# Altium PCB PCB_CSN_V3_3.PcbDoc
Units mil, origin at the board's own origin, x right, y up, seen from the top; angles counter-clockwise.
Board outline 3040 x 2075 mil, 2 copper layers (Top Layer, Bottom Layer); 91 components, 64 nets, 347 pads, 41 vias.
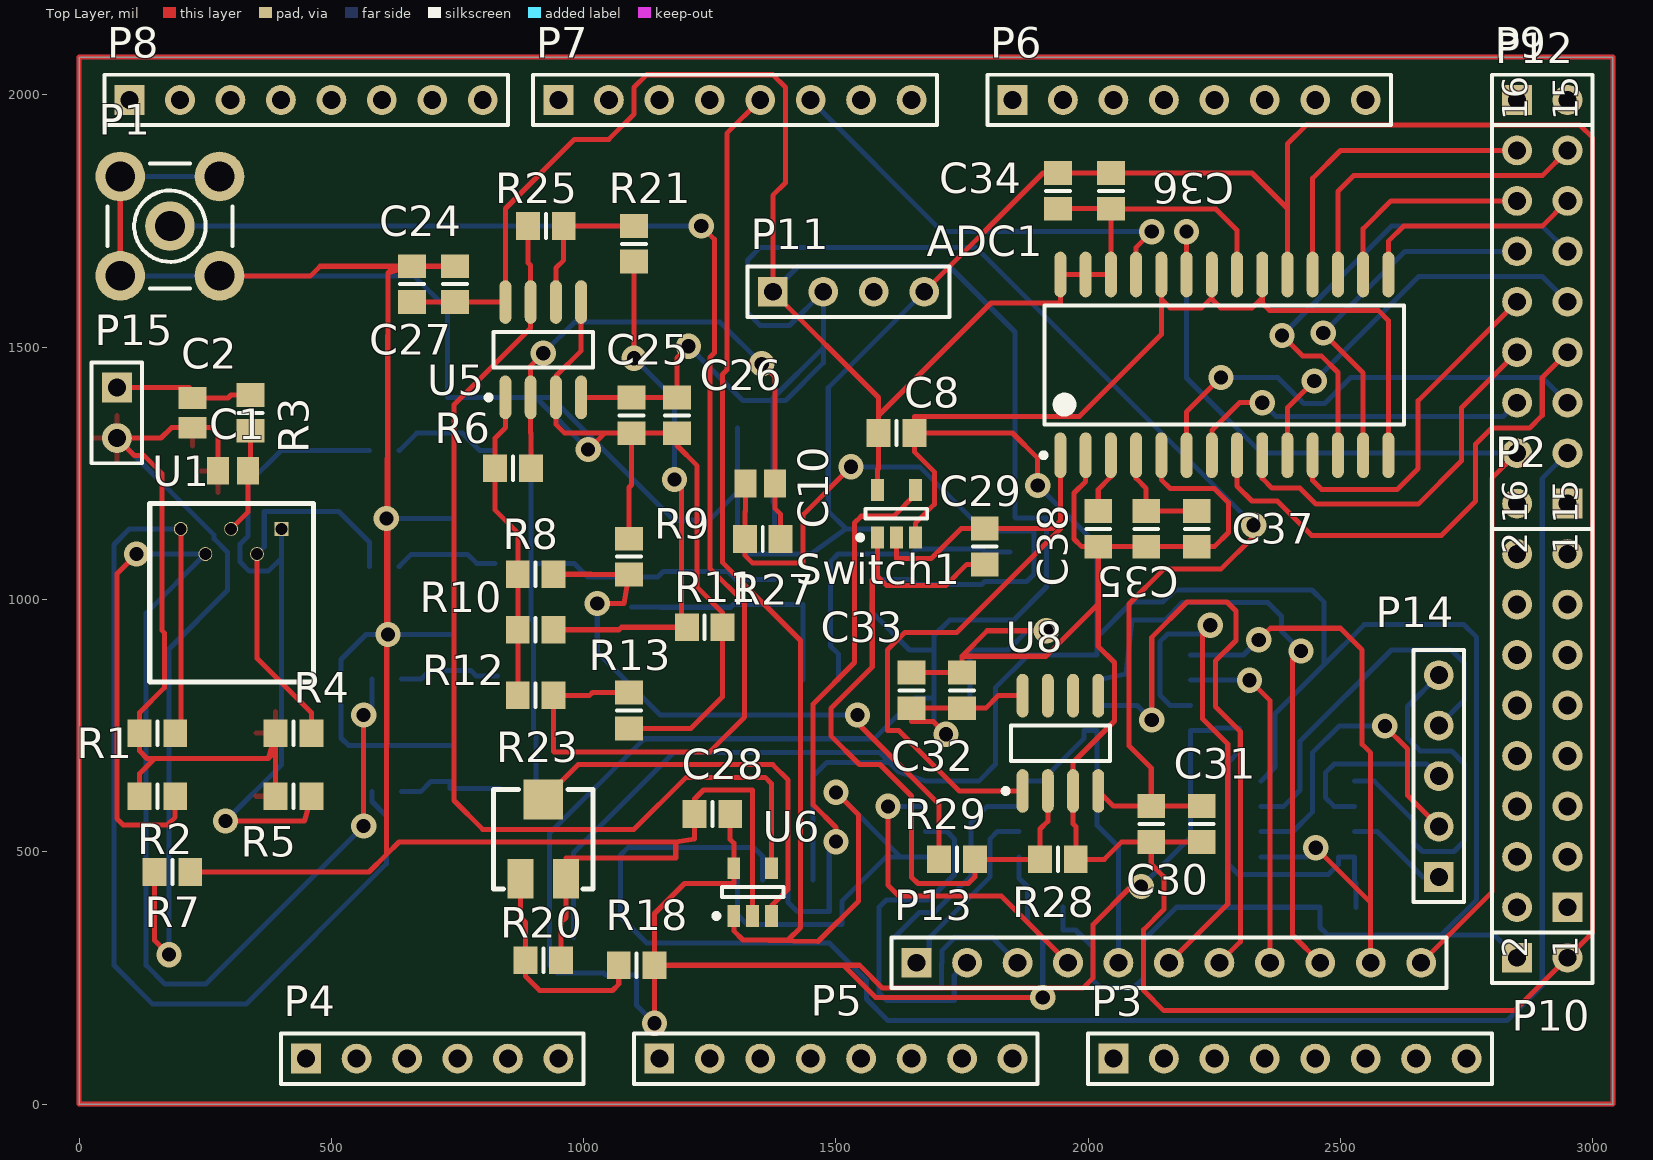
[diagram p0: Top Layer view]
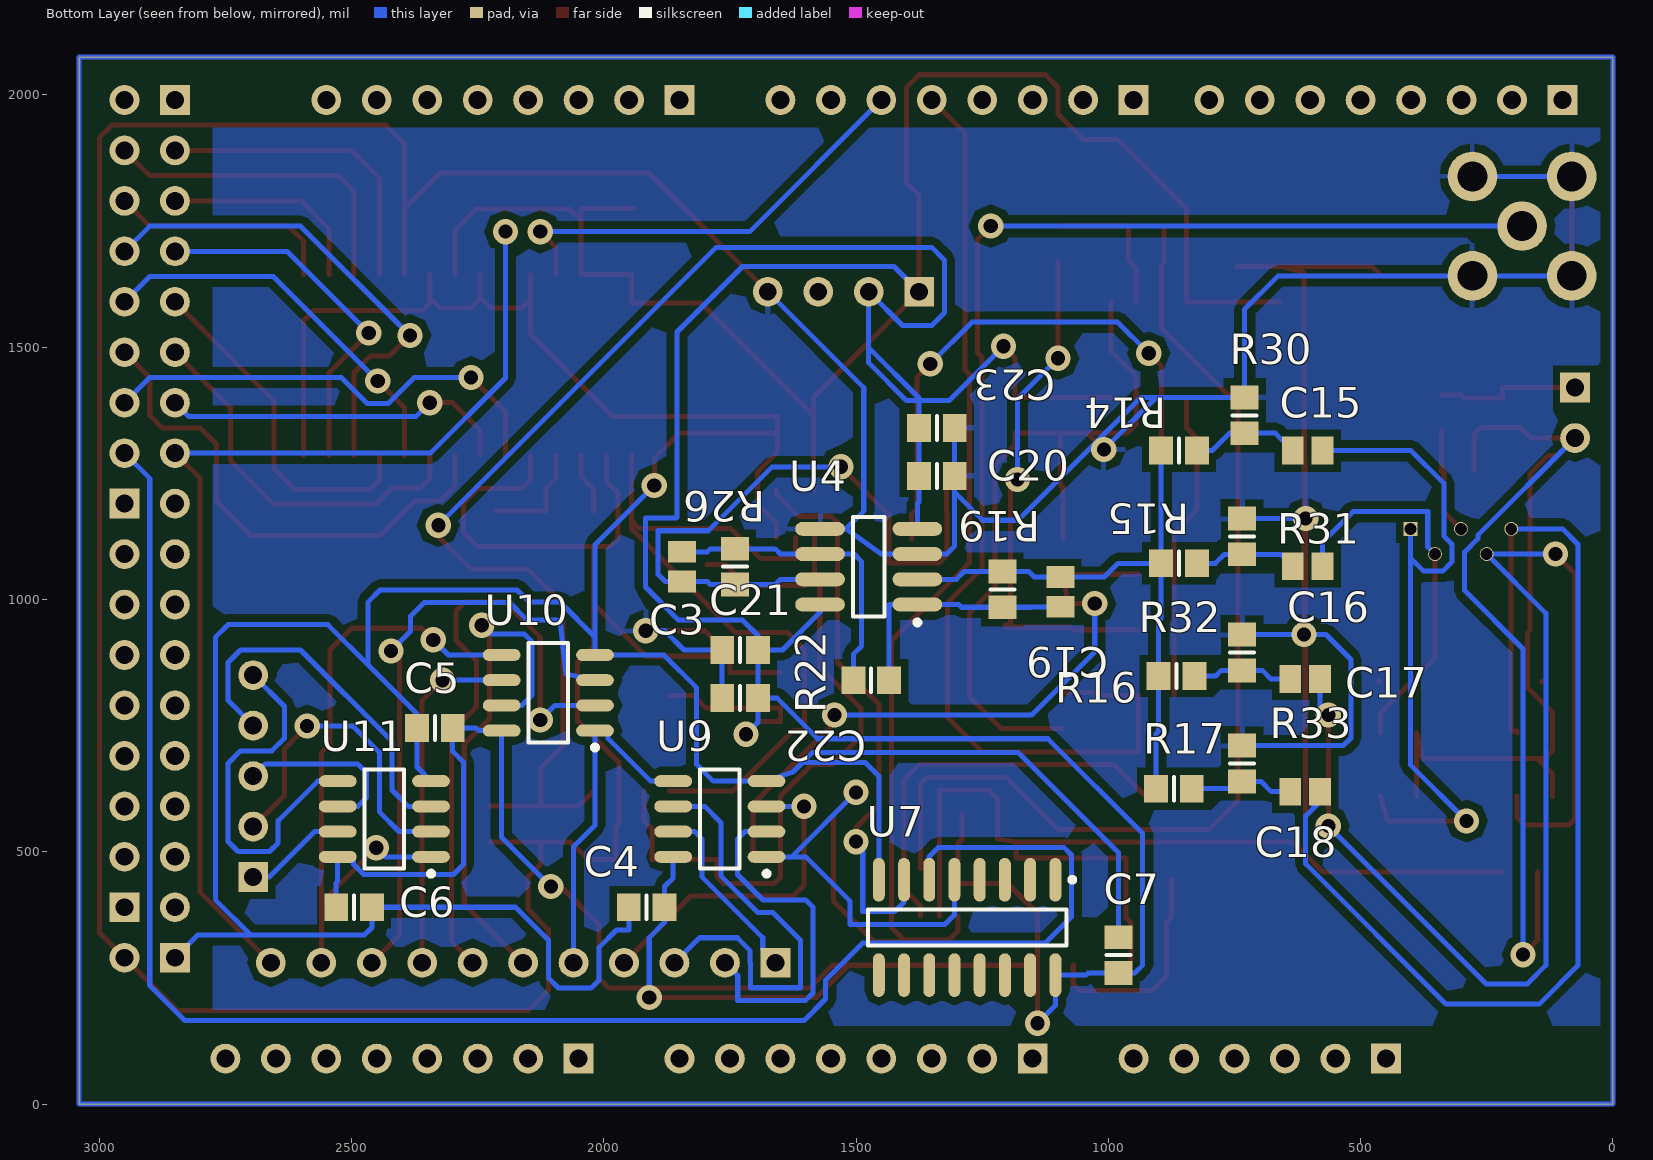
[diagram p1: Bottom Layer view, seen from below]

## Layer stack, top to bottom
Top Layer: signal copper 1.4
Dielectric: dielectric 12.6, FR-4, Dk 4.8
Bottom Layer: signal copper 1.4

## Board outline
0,0 0,2075 3040,2075 3040,0 0,0

## Design rules (kind name [scope] priority, off if disabled: settings)
Clearance [All] p1: gap=15
PolygonConnect [All] p1: connectstyle=Relief reliefconductorwidth=10 reliefentries=4 polygonreliefangle="90 Angle"
RoomDefinition RoomDefinition_1 [InComponentClass('Components Class 1') vs False] p1: confinementstyle=ConfineIn formatcopy=TRUE lockcomponents=FALSE outline 20,1490 520,1490 520,510 20,510
RoutingVias [All] p1: holewidth=28 width=50 viastyle="Through Hole" minholewidth=28 minwidth=50 maxholewidth=28 maxwidth=50
SilkscreenOverComponentPads [All] p1: minsilkscreentomaskgap=10
SolderMaskExpansion [All] p1: expansion=4
Width [All] p1: maxlimit=10 minlimit=10 preferedwidth=10
27 further rules are at their usual default settings.

## Classes and differential pairs
component class "Components Class 2": ADC1 C1 C2 C3 C4 C5 C6 C7 C8 C10 C15 C16 C17 C18 C19 C20 C21 C22 C23 C24 C25 C26 C27 C28 C29 C30 C31 C32 C33 C34 C35 C36 C37 C38 P1 P11 P13 P14 R1 R2 R3 R4 R5 R6 R7 R8 R9 R10 R11 R12 R13 R14 R15 R16 R17 R18 R19 R20 R21 R22 R23 R25 R26 R27 R28 R29 R30 R31 R32 R33 Switch1 U1 U4 U5 U6 U7 U8 U9 U10 U11
component class "Components Class 1": C1 C2 P15 R1 R2 R3 R4 R5 U1
net class potencia: +5 -5 GND
component class Logica_ADC: ADC1 C4 C5 C6 C7 C8 C29 C30 C31 C32 C33 C34 C35 C36 C37 C38 P2 P3 P4 P5 P6 P7 P8 P9 P10 P11 P12 P13 P14 R28 R29 Switch1 U7 U8 U9 U10 U11
component class Hamamatsu_acond_2: C1 C2 C3 C10 C15 C16 C17 C18 C19 C20 C21 C22 C23 C24 C25 C26 C27 C28 P1 P15 R1 R2 R3 R4 R5 R7 R8 R9 R10 R11 R12 R13 R14 R15 R16 R17 R18 R19 R20 R21 R22 R23 R25 R26 R27 R30 R31 R32 R33 U1 U4 U5 U6
net class analog: NetADC1_1 NetADC1_4 NetC29_1 NetR18_2 NetR23_W NetR25_2
net class digital: DGND NetADC1_18 NetADC1_23 NetADC1_25 NetSwitch1_4

## Components (designator, comment, footprint, x,y, rotation, side; value= is the part's Value field where it differs from the comment)
ADC1 "LTC1415" SO28_N 2270,1465 r90 top
C1 "Cap" C0805 305,1255 r0 top
C2 "Cap" C0805 225,1370 r90 top
C3 "Cap" C0805 1845,1065 r270 bottom
C4 "Cap" 6-0805_N 1915,390 r180 bottom
C5 "Cap" 6-0805_N 2335,745 r0 bottom
C6 "Cap" 6-0805_N 2495,390 r180 bottom
C7 "Cap" 6-0805_N 980,295 r90 bottom
C8 "Cap" 6-0805_N 1620,1330 r180 top
C10 "Cap" C0805 1350,1230 r0 top
C15 "Cap" C0805 605,1295 r0 bottom
C16 "Cap" C0805 605,1065.76 r0 bottom
C17 "Cap" C0805 610,842.43 r0 bottom
C18 "Cap" C0805 610,619.09 r0 bottom
C19 "Cap" C0805 1095,1015 r270 bottom
C20 "Cap Pol3" 6-0805_N 1340,1245 r0 bottom
C21 "Cap Pol3" 6-0805_N 1730,900 r0 bottom
C22 "Cap" 6-0805_N 1730,805 r180 bottom
C23 "Cap" 6-0805_N 1340,1340 r0 bottom
C24 "Cap" 6-0805_N 745,1625 r270 top
C25 "Cap" 6-0805_N 1095,1365 r270 top
C26 "Cap Pol3" 6-0805_N 1185,1365 r90 top
C27 "Cap Pol3" 6-0805_N 660,1625 r90 top
C28 "Cap" 6-0805_N 1255,575 r180 top
C29 "Cap" 6-0805_N 1795,1105 r90 top
C30 "Cap" 6-0805_N 2125,555 r270 top
C31 "Cap Pol3" 6-0805_N 2225,555 r90 top
C32 "Cap" 6-0805_N 1750,820 r270 top
C33 "Cap Pol3" 6-0805_N 1650,820 r90 top
C34 "Cap Pol3" 6-0805_N 1940,1810 r90 top
C35 "Cap Pol3" 6-0805_N 2115,1140 r270 top
C36 "Cap" 6-0805_N 2045,1810 r270 top
C37 "Cap" 6-0805_N 2215,1140 r90 top
C38 "Cap" 6-0805_N 2020,1140 r270 top
P1 "SMB" SMB_V-RJ45 180,1740 r0 top
P2 "Header 8X2" HDR2X8 2950,390 r90 top
P3 "Header 8" HDR1X8 2050,90 r0 top
P4 "Header 6" HDR1X6 450,90 r0 top
P5 "Header 8" HDR1X8 1150,90 r0 top
P6 "Header 8" HDR1X8 1850,1990 r0 top
P7 "Header 8" HDR1X8 950,1990 r0 top
P8 "Header 8" HDR1X8 100,1990 r0 top
P9 "Header 2" HDR1X2 2850,1990 r0 top
P10 "Header 2" HDR1X2 2850,290 r0 top
P11 "Header 4" HDR1X4 1375,1610 r0 top
P12 "Header 8X2" HDR2X8 2950,1190 r90 top
P13 "Header 11" HDR1X11 1660,280 r0 top
P14 "Header 5" HDR1X5 2695,450 r90 top
P15 "Header 2" HDR1X2 75,1420 r270 top
R1 "Res3" 6-0805_N 155,735 r0 top
R2 "Res3" 6-0805_N 155,610 r0 top
R3 "Res3" 6-0805_N 340,1370 r90 top
R4 "Res3" 6-0805_N 425,735 r0 top
R5 "Res3" 6-0805_N 425,610 r0 top
R6 "Res3" 6-0805_N 860,1260 r180 top
R7 "Res3" 6-0805_N 185,460 r180 top
R8 "Res3" 6-0805_N 905,1050 r180 top
R9 "Res3" 6-0805_N 1090,1085 r270 top
R10 "Res3" 6-0805_N 905,940 r180 top
R11 "Res3" 6-0805_N 1240,945 r180 top
R12 "Res3" 6-0805_N 905,810 r180 top
R13 "Res3" 6-0805_N 1090,780 r90 top
R14 "Res3" 6-0805_N 860,1295 r0 bottom
R15 "Res3" 6-0805_N 860,1071.67 r0 bottom
R16 "Res3" 6-0805_N 865,848.33 r0 bottom
R17 "Res3" 6-0805_N 870,625 r0 bottom
R18 "Res3" 6-0805_N 1105,275 r180 top
R19 "Res3" 6-0805_N 1210,1020 r270 bottom
R20 "Res3" 6-0805_N 920,285 r180 top
R21 "Res3" 6-0805_N 1100,1705 r90 top
R22 "Res3" 6-0805_N 1470,840 r180 bottom
R23 "RPot SM" POT4MM-2 920,525 r90 top
R25 "Res3" 6-0805_N 925,1740 r180 top
R26 "Res3" 6-0805_N 1740,1065 r270 bottom
R27 "Res3" 6-0805_N 1355,1120 r0 top
R28 "Res3" 6-0805_N 1940,485 r0 top
R29 "Res3" 6-0805_N 1740,485 r0 top
R30 "Res3" 6-0805_N 730,1365 r270 bottom
R31 "Res3" 6-0805_N 735,1125 r270 bottom
R32 "Res3" 6-0805_N 735,895 r270 bottom
R33 "Res3" 6-0805_N 735,675 r270 bottom
Switch1 "SN74LVC1G66DBVR" SOT23-5_N 1620,1170 r90 top
U1 "MPPC_S10985" S10985_HAM 140,1190 r0 top
U4 "AD8056" SO-8_M 1475,1065 r0 bottom
U5 "AD8056" S8_N 920,1495 r90 top
U6 "ADCMP600" SOT23-5_N 1335,420 r90 top
U7 "SN74LS279AD" D016_N 1280,350 r270 bottom
U8 "THS4062" S8_N 1945,715 r90 top
U9 "DS1100-500" SO-8_L 1770,565 r0 bottom
U10 "DS1100-500" SO-8_L 2110,815 r0 bottom
U11 "DS1100-500" SO-8_L 2435,565 r0 bottom

## Footprints (in the part's own frame and the unit in brackets; to place one, negate y for a bottom-side part, rotate by r counter-clockwise, add the part's x,y. Pads: shape width x height; smd on the part's side, far side on the other; paste and mask are expansions set on the pad)
6-0805_N [mm] "Chip Resistor, Body 2.0x1.2mm, IPC Medium Density"
  rect 1.2x1.4 smd: 1(-0.9,0) 2(0.9,0)
  silkscreen extent 0,-0.6 0,0.6, body extent -1.07,-0.7 1.07,0.7, height 0.7
C0805 [mm] "Chip Capacitor, Body 2.0x1.3mm, IPC High Density"
  rect 1.1x1.4 smd: 1(-0.75,0) 2(0.75,0)
  body extent -1.1,-0.72 1.1,0.72, height 1.4
D016_N [mm] "SOIC, 16-Leads, Body 9.9x3.9mm, Pitch 1.27mm, IPC Medium Density"
  oval 2.2x0.6 smd: 1(-2.4,4.445) 2(-2.4,3.175) 3(-2.4,1.905) 4(-2.4,0.635) 5(-2.4,-0.635) 6(-2.4,-1.905) 7(-2.4,-3.175) 8(-2.4,-4.445) 9(2.4,-4.445) 10(2.4,-3.175) 11(2.4,-1.905) 12(2.4,-0.635) 13(2.4,0.635) 14(2.4,1.905) 15(2.4,3.175) 16(2.4,4.445)
  silkscreen extent -2.52,-5 0.9,5.42, body extent -1.95,-4.95 1.95,4.95, height 1.75
HDR1X2 [mm] "Connector; Header; 2 Position"
  rect 1.5x1.5 hole 0.9: 1(0,0)
  round 1.5 hole 0.9: 2(2.54,0)
  silkscreen extent -1.27,-1.27 3.81,1.27
HDR1X4 [mm] "Connector; Header; 4 Position"
  rect 1.5x1.5 hole 0.9: 1(0,0)
  round 1.5 hole 0.9: 2(2.54,0) 3(5.08,0) 4(7.62,0)
  silkscreen extent -1.27,-1.27 8.89,1.27
HDR1X5 [mm] "Connector; Header; 5 Position"
  rect 1.5x1.5 hole 0.9: 1(0,0)
  round 1.5 hole 0.9: 2(2.54,0) 3(5.08,0) 4(7.62,0) 5(10.16,0)
  silkscreen extent -1.27,-1.27 11.43,1.27
HDR1X6 [mm] "Connector; Header; 6 Position"
  rect 1.5x1.5 hole 0.9: 1(0,0)
  round 1.5 hole 0.9: 2(2.54,0) 3(5.08,0) 4(7.62,0) 5(10.16,0) 6(12.7,0)
  silkscreen extent -1.27,-1.27 13.97,1.27
HDR1X8 [mm] "Connector; Header; 8 Position"
  rect 1.5x1.5 hole 0.9: 1(0,0)
  round 1.5 hole 0.9: 2(2.54,0) 3(5.08,0) 4(7.62,0) 5(10.16,0) 6(12.7,0) 7(15.24,0) 8(17.78,0)
  silkscreen extent -1.27,-1.27 19.05,1.27
HDR1X11 [mm] "Connector; Header; 11 Position"
  rect 1.5x1.5 hole 0.9: 1(0,0)
  round 1.5 hole 0.9: 2(2.54,0) 3(5.08,0) 4(7.62,0) 5(10.16,0) 6(12.7,0) 7(15.24,0) 8(17.78,0) 9(20.32,0) 10(22.86,0) 11(25.4,0)
  silkscreen extent -1.27,-1.27 26.67,1.27
HDR2X8 [mm] "Connector; Header; 8x2 Position"
  rect 1.5x1.5 hole 0.9: 1(0,0)
  round 1.5 hole 0.9: 2(0,2.54) 3(2.54,0) 4(2.54,2.54) 5(5.08,0) 6(5.08,2.54) 7(7.62,0) 8(7.62,2.54) 9(10.16,0) 10(10.16,2.54) 11(12.7,0) 12(12.7,2.54) 13(15.24,0) 14(15.24,2.54) 15(17.78,0) 16(17.78,2.54)
  silkscreen extent -1.27,-1.27 19.05,3.81
POT4MM-2 [mm] "Square Trimming Potentiometer"
  rect 2x1.3 smd: CCW(-2,-1.15) CW(-2,1.15)
  rect 2x2 smd: W(2,0)
  silkscreen extent -2.5,-2.5 2.5,2.5
S8_N [mm] "SOIC, 8-Leads, Body 4.9x3.9mm, Pitch 1.27mm, IPC Medium Density"
  oval 2.2x0.6 smd: 1(-2.4,1.905) 2(-2.4,0.635) 3(-2.4,-0.635) 4(-2.4,-1.905) 5(2.4,-1.905) 6(2.4,-0.635) 7(2.4,0.635) 8(2.4,1.905)
  silkscreen extent -2.52,-2.5 0.9,2.88, body extent -2,-2.5 2,2.5, height 1.76
S10985_HAM [mm]
  rect 0.7x0.7 hole 0.6: 1(6.64,-1.27)
  round 0.7 hole 0.6: 2(5.4,-2.54) 3(4.1,-1.27) 4(2.8,-2.54) 5(1.56,-1.27)
  Top Layer lines w0.254: 0,-8.95 0.025,-8.975 ; 8.175,-8.975 8.25,-8.9
  silkscreen extent 0,-8.97 8.25,0
SMB_V-RJ45 [mm] "Connector; SMB Straight"
  round 2.5 hole 1.5: 1(0,0) 2(-2.5,-2.5) 2(-2.5,2.5) 2(2.5,-2.5) 2(2.5,2.5)
  silkscreen extent -3.15,-3.15 3.15,3.15
SO28_N [mm] "28-Pin Plastic Small Outline Integrated Circuit 1.27 mm Pitch, IPC Medium Density"
  oval 2.3x0.6 smd: 1(-4.55,8.255) 2(-4.55,6.985) 3(-4.55,5.715) 4(-4.55,4.445) 5(-4.55,3.175) 6(-4.55,1.905) 7(-4.55,0.635) 8(-4.55,-0.635) 9(-4.55,-1.905) 10(-4.55,-3.175) 11(-4.55,-4.445) 12(-4.55,-5.715) 13(-4.55,-6.985) 14(-4.55,-8.255) 15(4.55,-8.255) 16(4.55,-6.985) 17(4.55,-5.715) 18(4.55,-4.445) 19(4.55,-3.175) 20(4.55,-1.905) 21(4.55,-0.635) 22(4.55,0.635) 23(4.55,1.905) 24(4.55,3.175) 25(4.55,4.445) 26(4.55,5.715) 27(4.55,6.985) 28(4.55,8.255)
  silkscreen extent -4.67,-9.05 3,9.23, body extent -3.8,-9.06 3.8,9.06, height 2.65
SO-8_L [mm] "SOIC, 8-Leads, Body 4.9x3.9mm, Pitch 1.27mm, IPC High Density"
  oval 1.9x0.6 smd: 1(-2.35,1.905) 2(-2.35,0.635) 3(-2.35,-0.635) 4(-2.35,-1.905) 5(2.35,-1.905) 6(2.35,-0.635) 7(2.35,0.635) 8(2.35,1.905)
  silkscreen extent -2.47,-2.5 1,2.88, body extent -1.95,-2.45 1.95,2.45, height 1.75
SO-8_M [mm] "SOIC, 8-Leads, Body 4.9x3.9mm, Pitch 1.27mm, IPC Low Density"
  oval 2.5x0.7 smd: 1(-2.45,1.905) 2(-2.45,0.635) 3(-2.45,-0.635) 4(-2.45,-1.905) 5(2.45,-1.905) 6(2.45,-0.635) 7(2.45,0.635) 8(2.45,1.905)
  silkscreen extent -2.57,-2.5 0.8,2.93, body extent -2,-2.5 2,2.5, height 1.75
SOT23-5_N [mm] "SOT23, 5-Leads, Body 2.9x1.6mm, Pitch 0.95mm, Lead Span 2.8mm, IPC Medium Density"
  rect 1.1x0.65 smd: 1(-1.2,0.95) 2(-1.2,0) 3(-1.2,-0.95) 4(1.2,-0.95) 5(1.2,0.95)
  silkscreen extent -1.32,-1.55 0.25,1.95, body extent -0.9,-1.55 0.9,1.55, height 1.45

## Part data
C1 C2 C3 C4 C5 C6 C7 C8 C10 C15 C16 C17 C18 C19 C22 C23 C24 C25 C28 C29 C30 C32 C36 C37 C38: "Capacitor"
C20 C21 C26 C27 C31 C33 C34 C35: "Polarized Capacitor (Surface Mount)"
P1: "SMB Straight Connector"
P2 P12: "Header, 8-Pin, Dual row"
P3 P5 P6 P7 P8: "Header, 8-Pin"
P4: "Header, 6-Pin"
P9 P10 P15: "Header, 2-Pin"
P11: "Header, 4-Pin"
P13: "Header, 11-Pin"
P14: "Header, 5-Pin"
R1 R2 R3 R4 R5 R6 R7 R8 R9 R10 R11 R12 R13 R14 R15 R16 R17 R18 R19 R20 R21 R22 R25 R26 R27 R28 R29 R30 R31 R32 R33: "Resistor"
R23: "Square Trimming Potentiometer"
U4: library part AD8002AR, "Dual 600MHz, 50mW Current Feedback Amplifier"
U5 U8: library part LT1253CS8, "Low Cost Dual Video Amplifier"
U7: "Quadruple S-R Latches"

## Via types
v1: diameter 50, hole 28, Top Layer to Bottom Layer, 41 vias

## Nets (pads, with @x,y where several pads share a name; then routed paths per layer and width w, separated by ;. In a path a pad name is that pad's centre, name@x,y a point inside that pad or via, vN(x,y) a via of type N, cw(c..) or ccw(c..) an arc to the next point about the centre after c; other vN are vias at no path point)
70_GND: C1.1 C2.1 P15.2 R1.1 R2.1 R4.1 R5.1 R7.2 | length 2899.1
  Top Layer w10: R2.1 119.57,654.57 150,685 ; R7.2 149.57,324.43 v1(178,296) ; C1.1 275.47,1327.5 262.5,1340.47 C2.1 183,1340.47 162.53,1320 P15.2 109.9,1285.1 128.9,1285.1 164,1250 164,939 169,934 169,825 119.57,775.57 R1.1 119.57,700 134.57,685 150,685 ; R5.1 389,610 389,699 ; 150,685 375,685 ; 375,685 389,699 ; 375,685 R4.1@389,735 ; 389,699 389.57,699.57 R4.1 R4.1@389,735 ; 389,699 R4.1@389,735
  Bottom Layer w10: P15.2 267.64,1127.36 267.64,1120.37 293.82,1094.19 293.82,1017.83 178,902.01 v1(178,296)
+5: ADC1.21 ADC1.26 ADC1.27 ADC1.28 C4.2 C5.1 C6.1 C7.1 C8.2 C21.1 C22.2 C24.2 C27.1 C28.1 C32.2 C33.1 C34.1 C36.2 P11.1 R18.1 Switch1.5 U4.8 U5.8 U6.5 U7.16 U8.8 U9.8 U10.8 U11.8 | length 10202.1
  Top Layer w10: C27.1 702,1589.57 C24.2 794,1589.57 794.08,1589.49 U5.8 845,1775 982,1912 1050,1912 1100,1962 1100,2015 1125,2040 1375,2040 1400,2015 1400,1826 1375,1801 P11.1 1584.57,1400.43 1584.57,1364.57 ; v1(1140.43,160) R18.1 ; C28.1 1290.43,524.16 1297.6,517 U6.5 1297.6,437 1200,437 1140.43,377.43 R18.1 ; Switch1.5 1582.6,1257.44 1584.57,1259.41 C8.2 1584.57,1364.57 ; v1(1718,733) 1693,758 1650,758 C33.1 1699,784.57 C32.2 1797,784.57 1821.92,809.49 U8.8 ; v1(1910,211) 1579,211 1515,275 ; C34.1 1992,1774.57 C36.2 2045,1750.79 ; v1(2105,431) 2085,431 2010,356 2010,250 1990,230 1592,230 1547,275 1515,275 ; ADC1.21 2295,1731.81 2252.81,1774 2068.21,1774 2045,1750.79 ; R18.1 1515,275 ; 1584.57,1364.57 1807.5,1587.5 1945,1587.5 ADC1.28 ADC1.27 ADC1.26 2045,1709 2045,1750.79
  Bottom Layer w10: v1(1140.43,160) 1105,195.43 U7.16 1044.05,255.51 1040,259.57 C7.1 947.43,259.57 932,275 932,536 1120,724 1576,724 1657,805 C22.2 ; P11.1 1425,1660 1725,1660 1855,1530 1855,1163 1856.82,1161.18 1917.56,1161.18 1917.56,1024.56 1852,959 1725,959 1694.57,928.57 C21.1 ; U4.8 1571,990 1571,975 1646,900 C21.1 ; v1(1718,733) 1694.57,756.43 C22.2 ; U9.8 1862.52,448.05 1879.57,431 C4.2 1879.57,360 1910,329.57 v1(1910,211) ; v1(2105,431) 2203,529 U10.8@2203,740 ; U10.8 U10.8@2203,740 ; C6.1 2530.43,438 2527.52,440.91 U11.8 2496,490 2496,475 2476,455 2298,455 2278,475 2278,677.43 2299.57,699 C5.1 2253,745 2248,740 U10.8@2203,740 ; C22.2 C21.1
+70V: C2.2 P15.1 R3.2 | length 287.9
  Top Layer w10: P15.1 219,1420 219,1399.53 C2.2 295.09,1399.53 301,1405.43 R3.2
-5: C20.2 C23.2 C25.1 C26.2 C30.1 C31.2 P11.2 U4.4 U5.4 U8.4 | length 3681.9
  Top Layer w10: U5.4 1044,1400.51 1044.08,1400.43 C25.1 C26.2 1185,1479 v1(1208,1502) ; U8.4 2050.08,590.43 C30.1 ; C31.2 C30.1 ; v1(2328,1147) 2328,1125 2263,1060 2150,1060 2081,991 2081,710 2125,666 C30.1
  Bottom Layer w10: v1(1208,1502) 1316,1394 1375.43,1394 ; U4.4 1378.54,1190 1375.43,1193.11 C20.2 C23.2 1375.43,1394 ; v1(2328,1147) 1777,1698 1350,1698 1325,1673 1325,1568 1350,1543 1408,1543 P11.2 1475,1499 ; 1375.43,1394 1375.43,1399.43 1475,1499 ; 1375.43,1394 1400,1394 1475,1469 1475,1499
DGND: ADC1.14 ADC1.20 ADC1.22 ADC1.24 C4.1 C5.2 C6.2 C7.2 C8.1 P10.1 Switch1.3 U7.8 U9.4 U10.4 U11.4 | length 7462.6
  Top Layer w10: Switch1.3 1657.4,1151 1695,1188.6 1695,1253 1655.43,1292.57 C8.1 ; v1(1900,1226) 1900,1280 1850,1330 C8.1 ; ADC1.24 2145,1595.5 ; ADC1.22 2245,1598 ; ADC1.20 2345,1598 ; ADC1.14 2595,1553 2575,1573 2359.5,1573 2345,1587.5 2345,1598 ; C8.1 1655.43,1362.5 1982.5,1362.5 2145,1525 2145,1595.5 ; 2145,1595.5 2162.5,1578 2225,1578 2245,1598 ; 2245,1598 2245,1595.5 2262.5,1578 2325,1578 2345,1598
  Bottom Layer w10: C7.2 980,498 1179,697 1586.12,697 1606.12,677 ; U7.8 1455,650 1482,677 1606.12,677 ; v1(1900,1226) 2017.48,1108.52 2017.48,925 ; C4.1 1950.43,345 1975,345 2010,310 2010,245 2025,230 2090,230 2110,250 2110,325 2175,390 C6.2 2459.57,350 2474.57,335 2700,335 ; U11.4 2370.43,667.95 C5.2 2370.43,773.43 2467,870 ; P10.1 2805,335 2700,335 ; 1606.12,677 1625,658.12 U9.4 1783,640 1816,673 1816,825 1881,890 U10.4 2017.48,925 ; 2017.48,925 2087,995 2148,995 2172,1019 2443.44,1019 2467,995.44 2467,870 ; 2467,870 2547,950 2745,950 2770,925 2770,405 2700,335
GND: ADC1.2 ADC1.5 ADC1.19 C20.1 C21.2 C22.1 C23.1 C24.1 C25.2 C26.1 C27.2 C28.2 C30.2 C31.1 C32.1 C33.2 C34.2 C35.2 C36.1 C37.1 C38.2 P1.2 P10.2 P11.4 R7.1 R9.1 R11.1 R13.1 R20.1 R23.CCW R28.2 R30.1 R31.1 R32.1 R33.1 U4.3 U4.5 U5.3 U5.5 U6.2 U8.3 | length 17656.5
  Top Layer w10: P1.2@81.57,1641.57 P1.2@81.57,1838.43 ; R7.1 574.67,460 609,494.33 ; P1.2@278.43,1641.57 459,1641.57 477.86,1660.43 625,1660.43 ; v1(609,1160.43) 609,494.33 ; v1(612,930.43) 612,1647.43 ; C24.1 702,1660.43 C27.2 ; R20.1 955.43,360 965.28,369.84 R23.CCW 965.28,488 1182.57,488 1182.57,519.37 ; U5.5 995,1493 945,1443 U5.3 945,1347.07 962.5,1329.57 1041.57,1329.57 ; v1(1009,1297) 1041.57,1329.57 ; R13.1 1213,744.57 1275.43,807 R11.1 1275.43,973.8 1225,1024.23 1225,1265 1185,1305 C26.1 1139,1329.57 C25.2 ; R9.1 1090,1222 1095,1227 C25.2 ; U6.2 1335,622.56 1237.5,622.56 1219.57,604.63 C28.2 1219.57,525 1182.57,519.37 ; C33.2 C32.1 1750,887.5 ; P11.4 1910.43,1845.43 C34.2 C36.1 2324.57,1845.43 2395,1775 ; v1(1917,938) 1800,938 1750,887.5 ; ADC1.2 1995,1234 1972,1211 1972,1120.07 1987.5,1104.57 C38.2 ; ADC1.5 2145,1237.5 2162.5,1220 2250,1220 2278,1192 2278,1132.57 2250,1104.57 C37.1 C35.2 C38.2 ; C31.1 2174,519.57 C30.2 ; ADC1.19 2395,1775 ; 609,494.33 610.13,930.44 610.73,1160.43 612,1647.43 ; 609,494.33 634.04,519.37 1182.57,519.37 ; 612,1647.43 625,1660.43 ; 612,1647.43 C27.2 ; 625,1660.43 C27.2 ; 1041.57,1329.57 C25.2 ; 1750,887.5 1916.5,887.5 2020,991 ; 2020,991 2020,907 2052,875 2052,759 1970,677 U8.3 1970,555.43 1975.43,550 R28.2 2032,485 2066.57,519.57 C30.2 ; 2020,991 C38.2 ; C30.2 2125,475.58 2150,450.58 2150,385.58 2110,345.58 2110,225 2150,185 2845,185 P10.2 3000,340 3000,1915 2975,1940 2432,1940 2395,1903 2395,1775
  Bottom Layer w10: P1.2@81.57,1641.57 278.43,1641.57 663.43,1641.57 730,1575 R30.1 905.57,1400.43 ; P1.2@81.57,1838.43 P1.2@278.43,1838.43 ; v1(609,1160.43) R31.1 ; R33.1 534.19,710.43 519,725.62 519,881 568.43,930.43 v1(612,930.43) R32.1 ; v1(1009,1297) 905.57,1400.43 ; C23.1 C20.1 1304.57,1212.5 ; U4.5 1519.8,1140 ; P11.4 1484.8,1419.8 1484.8,1175 1519.8,1140 ; C22.1 1765.43,852 C21.2 1841,900 1879,938 v1(1917,938) ; 905.57,1400.43 935.57,1400.43 1179,1157 1249.07,1157 1304.57,1212.5 ; 1304.57,1212.5 1304.57,1106 1320.57,1090 U4.3 1450,1090 1519.8,1140
NetADC1_1: ADC1.1 C29.2 Switch1.2 U8.1 | length 1464.1
  Top Layer w10: Switch1.2 1620,1081 1688.57,1081 1748,1140.43 C29.2 1929.84,1140.43 1945,1155.59 ; U8.1 1870,620 1745,620 1625,740 1602,740 1602,900 1637,935 1740,935 1945,1140 1945,1155.59 ; ADC1.1 1945,1155.59
NetADC1_3: ADC1.3 C38.1 | length 120.8
  Top Layer w10: C38.1 2020,1218 2045,1243 ADC1.3
NetADC1_4: ADC1.4 C35.1 C37.2 | length 218.7
  Top Layer w10: ADC1.4 2095,1240 2115,1220 C35.1 2164,1175.43 C37.2
NetADC1_6: ADC1.6 P12.5 | length 933.1
  Top Layer w10: ADC1.6 2195,1372 v1(2263,1440)
  Bottom Layer w10: v1(2263,1440) 2375.83,1440 2427.83,1388 2468.25,1388 2520.25,1440 2900,1440 P12.5
NetADC1_7: ADC1.7 P12.6 | length 699.3
  Top Layer w10: ADC1.7 2245,1335 2300,1390 v1(2345,1390)
  Bottom Layer w10: v1(2345,1390) 2372,1363 2823,1363 P12.6
NetADC1_8: ADC1.8 P12.7 | length 1017.2
  Top Layer w10: ADC1.8 2295,1224.5 2324.5,1195 2375,1195 2443,1127 2700,1127 2768,1195 2768,1308 2800,1340 2875,1340 2900,1365 2900,1440 P12.7
NetADC1_9: ADC1.9 P12.8 | length 758.2
  Top Layer w10: ADC1.9 2345,1240 2364.41,1220.59 2420,1220.59 2451.59,1189 2654,1189 2740,1275 2740,1380 P12.8
NetADC1_10: ADC1.10 P12.9 | length 777.5
  Top Layer w10: ADC1.10 2395,1380 v1(2448,1433)
  Bottom Layer w10: v1(2448,1433) 2655,1640 2900,1640 P12.9
NetADC1_11: ADC1.11 P12.10 | length 695.3
  Top Layer w10: ADC1.11 2445,1235.9 2462.9,1218 2612.5,1218 2654,1259.5 2654,1394 P12.10
NetADC1_12: ADC1.12 P12.11 | length 981.6
  Top Layer w10: v1(2384.21,1523.21) 2424.62,1482.79 2462.21,1482.79 2495,1450 ADC1.12
  Bottom Layer w10: v1(2384.21,1523.21) 2601,1740 2900,1740 P12.11
NetADC1_13: ADC1.13 P12.12 | length 726
  Top Layer w10: v1(2466,1528) 2545,1449 ADC1.13
  Bottom Layer w10: v1(2466,1528) 2628,1690 P12.12
NetADC1_15: ADC1.15 P12.13 | length 454
  Top Layer w10: ADC1.15 2595,1710 2625,1740 2900,1740 P12.13
NetADC1_16: ADC1.16 P12.14 | length 418.6
  Top Layer w10: ADC1.16 2545,1735 2600,1790 P12.14
NetADC1_17: ADC1.17 P12.15 | length 653.4
  Top Layer w10: ADC1.17 2495,1809 2526,1840 2900,1840 P12.15
NetADC1_18: ADC1.18 P12.16 | length 618.6
  Top Layer w10: ADC1.18 2445,1835 2500,1890 P12.16
NetADC1_23: ADC1.23 P12.4 P13.11 | length 2180.3
  Top Layer w10: ADC1.23 v1(2195,1729) ; P13.11 2800,420 2800,1240 P12.4
  Bottom Layer w10: v1(2195,1729) 2195,1439 2344,1290 P12.4
NetADC1_25: ADC1.25 P7.6 | length 881.8
  Top Layer w10: ADC1.25 2095,1698 v1(2126,1729)
  Bottom Layer w10: P7.6 1711,1729 v1(2126,1729)
NetC1_2: C1.2 R3.1 U1.3 | length 213.8
  Top Layer w10: U1.3 334.53,1173.11 C1.2 340,1255 R3.1
NetC3_1: C3.1 R22.1 R26.1 U4.6 | length 610.8
  Bottom Layer w10: R22.1 1505.43,891.57 1489,908 1489,1075 1504,1090 U4.6 1650,1090 1660.43,1100.43 R26.1 1789,1100.43 1794.9,1094.53 C3.1
NetC3_2: C3.2 C10.1 R26.2 R27.1 U4.7 | length 1330.2
  Top Layer w10: C10.1 1320.47,1174.9 1319.57,1174 R27.1 1319.57,1087.5 1335.07,1072 1435,1072 1435,1168 v1(1530,1263)
  Bottom Layer w10: v1(1530,1263) 1666.18,1263 1793,1136.18 1892.56,1136.18 1892.56,1050 1878.03,1035.47 C3.2 1794.91,1035.47 1789,1029.57 R26.2 1660.43,1029.57 1650,1040 U4.7
NetC10_2: C10.2 R6.1 R27.2 U5.2 | length 1093.9
  Top Layer w10: R6.1 895.43,1330 895,1330.43 U5.2 895,1463 v1(920,1488) ; v1(1353,1467) 1379.53,1440.47 C10.2 1379.53,1179.91 1390.43,1169 R27.2
  Bottom Layer w10: v1(920,1488) 981.73,1549.73 1270.27,1549.73 v1(1353,1467)
NetC15_1: C15.1 R5.2 U1.1 | length 1363.2
  Top Layer w10: v1(290,561) 446.43,561 R5.2
  Bottom Layer w10: v1(290,561) 401.42,672.42 401.42,1082.42 ; U1.1 401.42,1082.42 ; C15.1 400,1295 335.2,1230.2 335.2,1126.01 318.82,1109.63 318.82,1074.68 337.5,1056 375,1056 401.42,1082.42
NetC15_2: C15.2 R14.1 R30.2 | length 218.7
  Bottom Layer w10: C15.2 669.09,1329.57 R30.2 760,1329.57 794.57,1295 R14.1
NetC16_1: C16.1 R4.2 U1.2 | length 770.9
  Top Layer w10: U1.2 352.6,883.4 460.43,775.57 R4.2
  Bottom Layer w10: U1.2 367,1104.4 367,1174 515,1174 575.47,1113.53 C16.1
NetC16_2: C16.2 R15.1 R31.2 | length 207.3
  Bottom Layer w10: C16.2 658.33,1089.57 R31.2 770,1089.57 787.9,1071.67 R15.1
NetC17_1: C17.1 R2.2 U1.4 | length 2583.2
  Top Layer w10: v1(114,1090) 75,1051 75,565.5 87.5,553 175,553 190.43,568.43 R2.2 ; v1(564,551) v1(564,771)
  Bottom Layer w10: v1(114,1090) U1.4 133,972.76 133,275 170,238 251,238 v1(564,551) ; v1(564,771) 580.47,787.47 C17.1
NetC17_2: C17.2 R16.1 R32.2 | length 201.8
  Bottom Layer w10: C17.2 678,842.43 695.14,859.57 R32.2 776,859.57 787.23,848.33 R16.1
NetC18_1: C18.1 R1.2 U1.5 | length 2238
  Top Layer w10: R1.2 190.43,739 202,739 202,1139.42 U1.5
  Bottom Layer w10: U1.5 100,1140 69,1109 69,275 146,198 331,198 609,476 609,571 580.47,599.53 C18.1
NetC18_2: C18.2 R17.1 R33.2 | length 218.1
  Bottom Layer w10: C18.2 677,619.09 697.47,639.57 R33.2 735,625 R17.1
NetC19_1: C19.1 R14.2 R15.2 R16.2 R17.2 R19.1 U4.2 | length 1179.4
  Bottom Layer w10: R14.2 R15.2 ; R17.2 905.43,734 900.43,739 R16.2 900.43,957 895.43,962 R15.2 ; U4.2 1301.43,1040 1286,1055.43 R19.1 1157.9,1055.43 1147,1044.53 C19.1 1008.14,1044.53 981,1071.67 R15.2
NetC19_2: C19.2 R19.2 R22.2 U4.1 | length 492.2
  Bottom Layer w10: C19.2 1152,985.47 1152.91,984.57 R19.2 1291,984.57 1296.43,990 U4.1 1434.57,990 R22.2
NetC29_1: C29.1 R28.1 R29.2 Switch1.1 U8.2 | length 1484.8
  Top Layer w10: Switch1.1 1582.6,1049.6 ; C29.1 1759.57,1069.57 1718,1028 1600,1028 1582.6,1045.4 1582.6,1049.6 ; U8.2 1920,560.43 1904.57,545 R28.1 R29.2 1775.43,449.93 1762.5,437 1662.5,437 1650,449.5 1650,610.62 1587.5,673.12 1546.88,673.12 1490,730 1490,784 1572,866 1572,1039 1582.6,1049.6
NetP1_1: P1.1 R12.1 R13.2 | length 2739.4
  Top Layer w10: R13.2 1017.43,815.43 1012,810 R12.1 940.43,699 941.43,698 1250,698 1319.06,767.06 1319.06,993 1250,1062.06 1250,1479.73 1258.93,1488.66 1258.93,1714.07 v1(1233,1740)
  Bottom Layer w10: P1.1 v1(1233,1740)
NetP7_5: P7.5 U6.1 U7.5 U9.1 | length 3124.3
  Top Layer w10: U6.1 1297.6,343.4 1316,325 ; P7.5 1283.93,1923.93 1283.93,1454.73 1275,1445.81 1275,1073.79 1430,918.79 1430,568.3 1430.2,568.1 1430.2,350 1405.2,325 1316,325 ; v1(1500,617.8) 1545,572.8 1545,402.43 1464.57,322 1316,325
  Bottom Layer w10: U7.5 1305,375 1323.82,356.18 1511.81,356.18 1511.81,401.81 1600,490 1627.8,490 ; v1(1500,617.8) 1627.8,490 ; U9.1 1627.8,490
NetP12_3: P12.3 U7.6 | length 3502.4
  Bottom Layer w10: U7.6 1355,490.5 1337.5,508 1087.5,508 1073,493.5 1073,371 1125,319 1487,319 1560.47,245.53 1560.47,207.98 1602.98,165.47 2830.47,165.47 2900,235 2900,1240 P12.3
NetP13_1: P13.1 U9.7 | length 368.8
  Bottom Layer w10: P13.1 1685,305 1685,329.53 1805,449.53 1805,525 1820,540 U9.7
NetP13_2: P13.2 U9.2 | length 720.3
  Bottom Layer w10: U9.2 1720,540 1735,525 1735,455 1684.53,404.53 1600,404.53 1585.47,390 1585.47,220 1600,205.47 1734.53,205.47 1734.53,254.53 P13.2
NetP13_3: P13.3 U9.6 | length 871.9
  Bottom Layer w10: P13.3 1810.47,329.53 1735.53,329.53 1710,304 1710,280 1709.53,279.53 1709.53,230.47 1610.47,230.47 1610.47,325 1665,379.53 1694.88,379.53 1768,452.64 1768,558 1800,590 U9.6
NetP13_4: P13.4 U9.3 | length 651.3
  Top Layer w10: v1(1603,590) 1603,434 1625,412 1828,412 P13.4
  Bottom Layer w10: v1(1603,590) U9.3
NetP13_5: P13.5 U9.5 U10.1 | length 682.8
  Bottom Layer w10: U9.5 1907,640 1992,725 1992,740 U10.1 2017.48,552.52 2060,510 P13.5
NetP13_6: P13.6 U10.7 | length 1032.2
  Top Layer w10: P13.6 2276.6,396.6 2276.6,713.4 2227,763 2227,934 v1(2242,949)
  Bottom Layer w10: U10.7 2162.5,790 2142,810.5 2142,916 2157.2,931.2 2224.2,931.2 v1(2242,949)
NetP13_7: P13.7 U10.2 | length 1239.6
  Top Layer w10: v1(2126,761) 2126,925 2196,995 2275,995 2292.81,977.19 2292.81,918.81 2252,878 2252,788 2301.6,738.4 2301.6,321.6 P13.7
  Bottom Layer w10: U10.2 2097,790 v1(2126,761)
NetP13_8: P13.8 U10.6 | length 694
  Top Layer w10: v1(2320,840) 2360,800 P13.8
  Bottom Layer w10: U10.6 v1(2320,840)
NetP13_9: P13.9 U10.3 | length 1220.5
  Top Layer w10: v1(2422,898) 2405.12,881.12 2405.12,334.88 P13.9
  Bottom Layer w10: U10.3 2075,852.5 2087,959 2152,959 2187,994 2355.91,994 2383,966.91 2383,937 v1(2422,898)
NetP13_10: P13.10 U10.5 U11.1 | length 1277.4
  Top Layer w10: v1(2338,920) 2361,943 2500,943 2543,900 2543,713 2560,696 2560,399 ; v1(2451,508) 2560,399 ; P13.10 2560,399
  Bottom Layer w10: U10.5 2308,890 v1(2338,920) ; U11.1 2433,490 v1(2451,508)
NetP14_1: P14.1 U11.7 | length 204.8
  Bottom Layer w10: U11.7 2572.91,540 2662.91,450 P14.1
NetP14_2: P14.2 U11.2 | length 644.5
  Top Layer w10: v1(2588,749) 2633,704 2633,612 P14.2
  Bottom Layer w10: U11.2 2406,540 2445,579 2445,697 2497,749 v1(2588,749)
NetP14_3: P14.3 U11.6 | length 356
  Bottom Layer w10: U11.6 2487.5,590 2470,607.5 2470,656.5 2487.5,674 2671,674 P14.3
NetP14_4: P14.4 U11.3 | length 743.5
  Bottom Layer w10: U11.3 2387.5,590 2420,622.5 2420,719 2601,900 2720,900 2745,875 2745,800 P14.4
NetP14_5: P14.5 U11.5 | length 747.3
  Bottom Layer w10: U11.5 2567,640 2645.47,561.53 2645.47,517.5 2662.5,500.47 2725,500.47 2745,520.47 2745,675 2720,700 2658,700 2633,725 2633,788 P14.5
NetR6_2: R6.2 R8.2 R10.2 R12.2 U5.1 | length 617.6
  Top Layer w10: U5.1 845,1340.43 824.57,1320 R6.2 824.57,1177 869.57,1132 R8.2 R10.2 R12.2
NetR8_1: R8.1 R9.2 R29.1 | length 1277.9
  Top Layer w10: R8.1 1015,1050 1015.43,1049.57 R9.2 1080,992 v1(1027,992) ; v1(1543,771) 1543,755.17 1704.57,593.6 R29.1
  Bottom Layer w10: v1(1027,992) 1027,896 1152,771 v1(1543,771)
NetR10_1: R10.1 R11.2 R21.1 | length 1040.3
  Top Layer w10: R10.1 1070,940 1075,945 R11.2 1204.57,949 1194,949 1194,1224 v1(1180,1238) ; v1(1100,1478) R21.1
  Bottom Layer w10: v1(1100,1478) 1180,1398 v1(1180,1238)
NetR18_2: R18.2 R20.2 R23.CW | length 436.4
  Top Layer w10: R23.CW 874.72,369.84 884.57,360 R20.2 884.57,253.43 913,225 1057.07,225 1069.57,237.5 R18.2
NetR21_2: R21.2 R25.1 U5.6 | length 296.7
  Top Layer w10: U5.6 945,1657 960.43,1672.43 R25.1 1030,1740 1030.43,1740.43 R21.2
NetR23_W: R23.W U6.3 | length 809.4
  Top Layer w10: R23.W 988.82,672.56 1375,672.56 1405,642.56 1405,543.3 1405.2,543.1 1405.2,425.59 1372.4,392.79 U6.3
NetR25_2: R25.2 U5.7 U6.4 | length 2072.6
  Top Layer w10: R25.2 889.57,1667.43 895,1662 U5.7 895,1538 743,1386 743,601.37 800,544.37 1100,544.37 1203.19,647.56 1359.84,647.56 1372.4,635 U6.4
NetSwitch1_4: Switch1.4 U7.7 | length 1115.8
  Top Layer w10: v1(1500,520) 1500,548 1455,593 1455,793 1537,875 1537,1152 1550,1165 1614.4,1165 1657.4,1208 Switch1.4
  Bottom Layer w10: U7.7 1405,400 1423.82,381.18 1486.81,381.18 1486.81,506.81 v1(1500,520)
pads on no net: P2.1 P2.2 P2.3 P2.4 P2.5 P2.6 P2.7 P2.8 P2.9 P2.10 P2.11 P2.12 P2.13 P2.14 P2.15 P2.16 P3.1 P3.2 P3.3 P3.4 P3.5 P3.6 P3.7 P3.8 P4.1 P4.2 P4.3 P4.4 P4.5 P4.6 P5.1 P5.2 P5.3 P5.4 P5.5 P5.6 P5.7 P5.8 P6.1 P6.2 P6.3 P6.4 P6.5 P6.6 P6.7 P6.8 P7.1 P7.2 P7.3 P7.4 P7.7 P7.8 P8.1 P8.2 P8.3 P8.4 P8.5 P8.6 P8.7 P8.8 P9.1 P9.2 P11.3 P12.1 P12.2 U7.1 U7.2 U7.3 U7.4 U7.9 U7.10 U7.11 U7.12 U7.13 U7.14 U7.15 U8.5 U8.6 U8.7

## Polygon pours and split planes (outlines as drawn)
70_GND on Top Layer "Top Layer-No Net" (none, pour order 4): 20,1490 20,510 520,510 520,1490
GND on Bottom Layer "Top Layer-No Net" (solid, pour order 8): 25,1935 25,155 2780,155 2775,160 2775,1935 25,1935

## Other copper
Multi-Layer:
  the board outline again, w10

## Text inside footprints (layer, text, board x,y; h text height)
P2: Top Overlay "2" at 2870,290 h50 r90; Top Overlay "1" at 2970,290 h50 r90; Top Overlay "15" at 2970,1150 h50 r90; Top Overlay "16" at 2870,1150 h50 r90
P12: Top Overlay "2" at 2870,1090 h50 r90; Top Overlay "1" at 2970,1090 h50 r90; Top Overlay "15" at 2970,1950 h50 r90; Top Overlay "16" at 2870,1950 h50 r90